# Altium PCB METR4810_PCB_b_Layout.PcbDoc
Units mil, origin at the board's own origin, x right, y up, seen from the top; angles counter-clockwise.
Board outline 2400 x 2615 mil, 2 copper layers (Top Layer, Bottom Layer); 35 components, 39 nets, 163 pads, 21 vias.
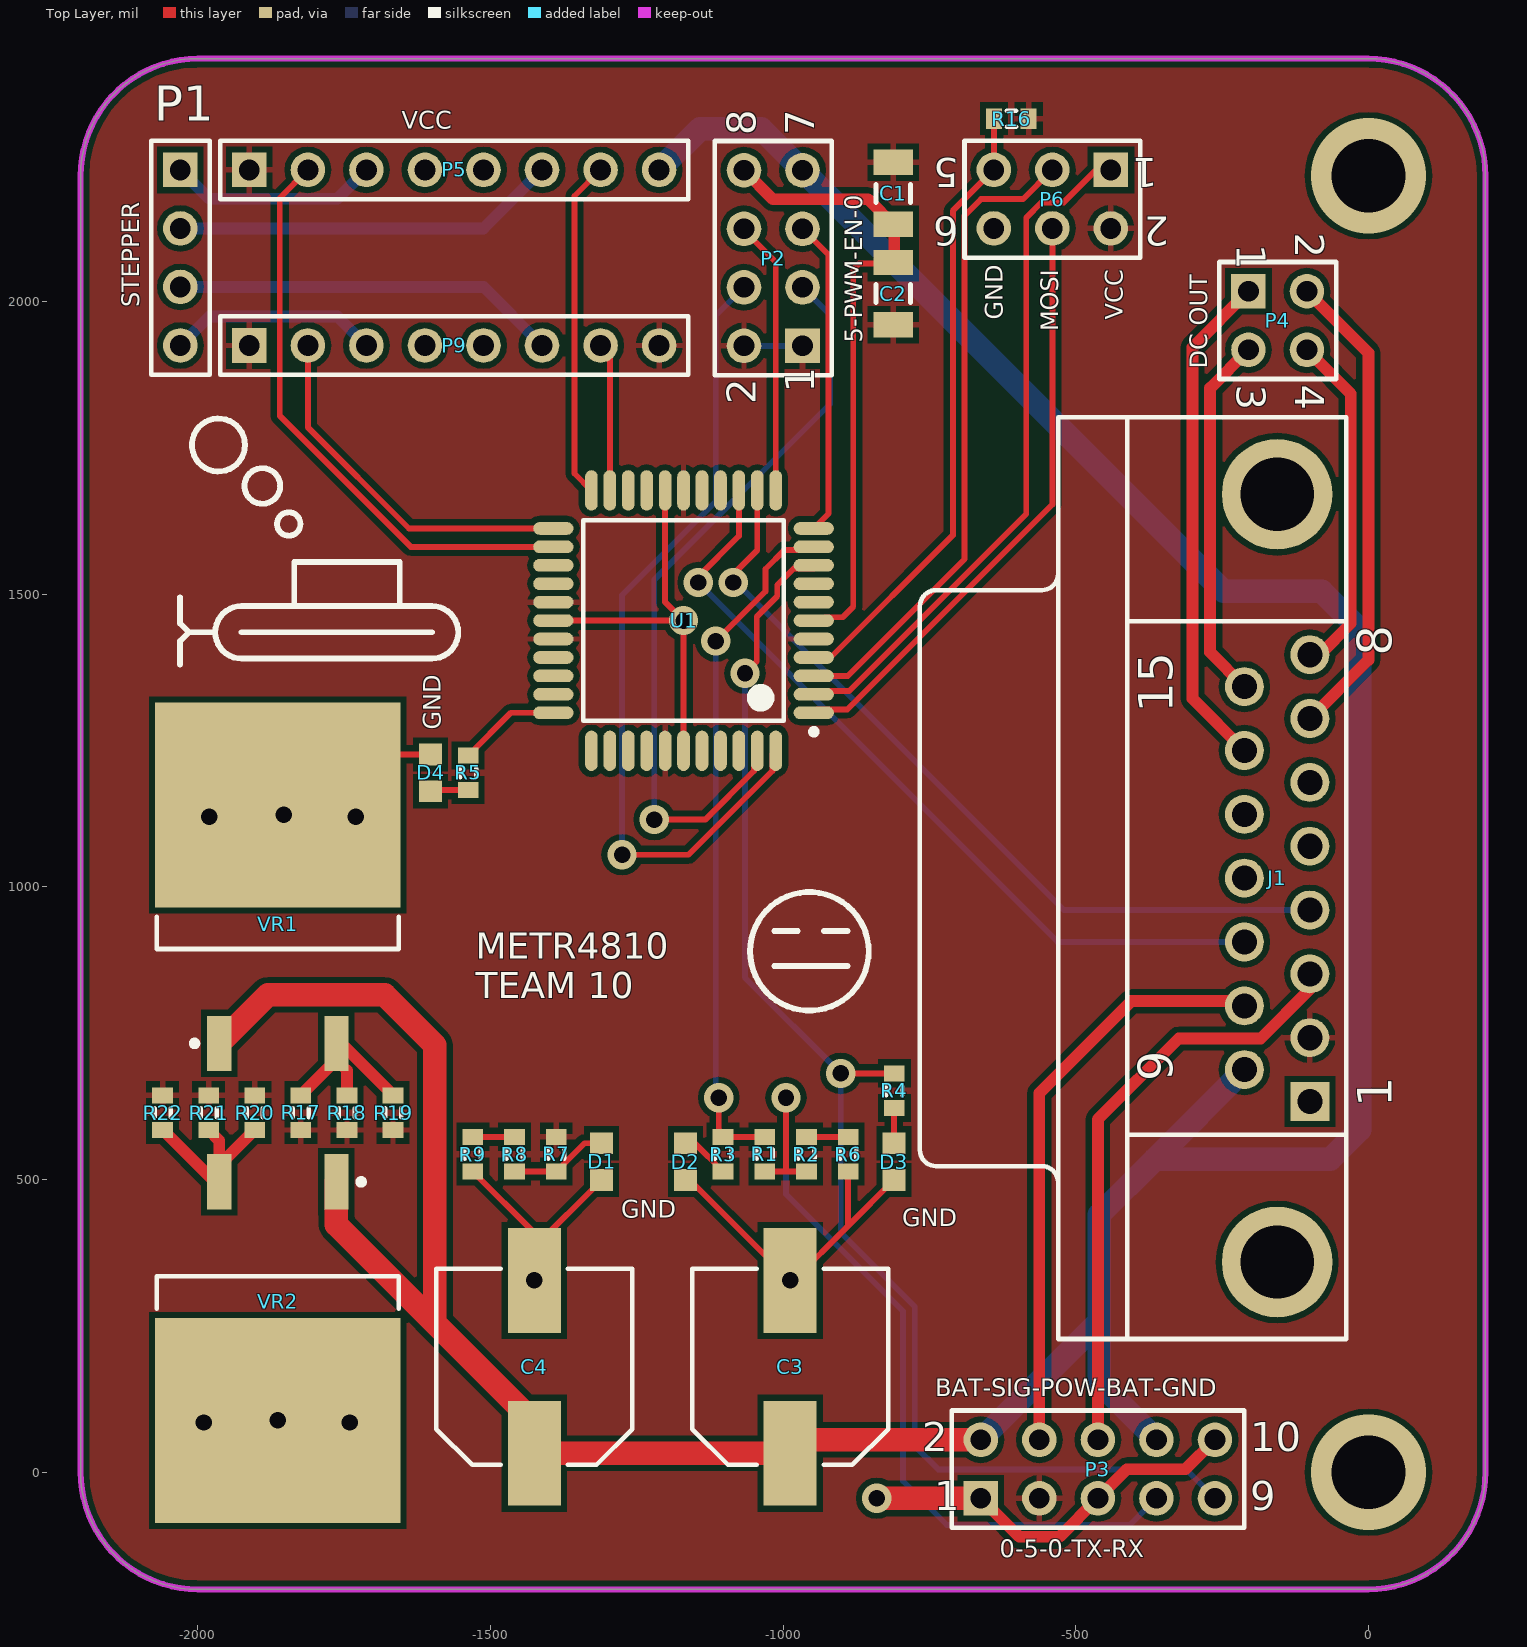
[diagram p0: Top Layer view]
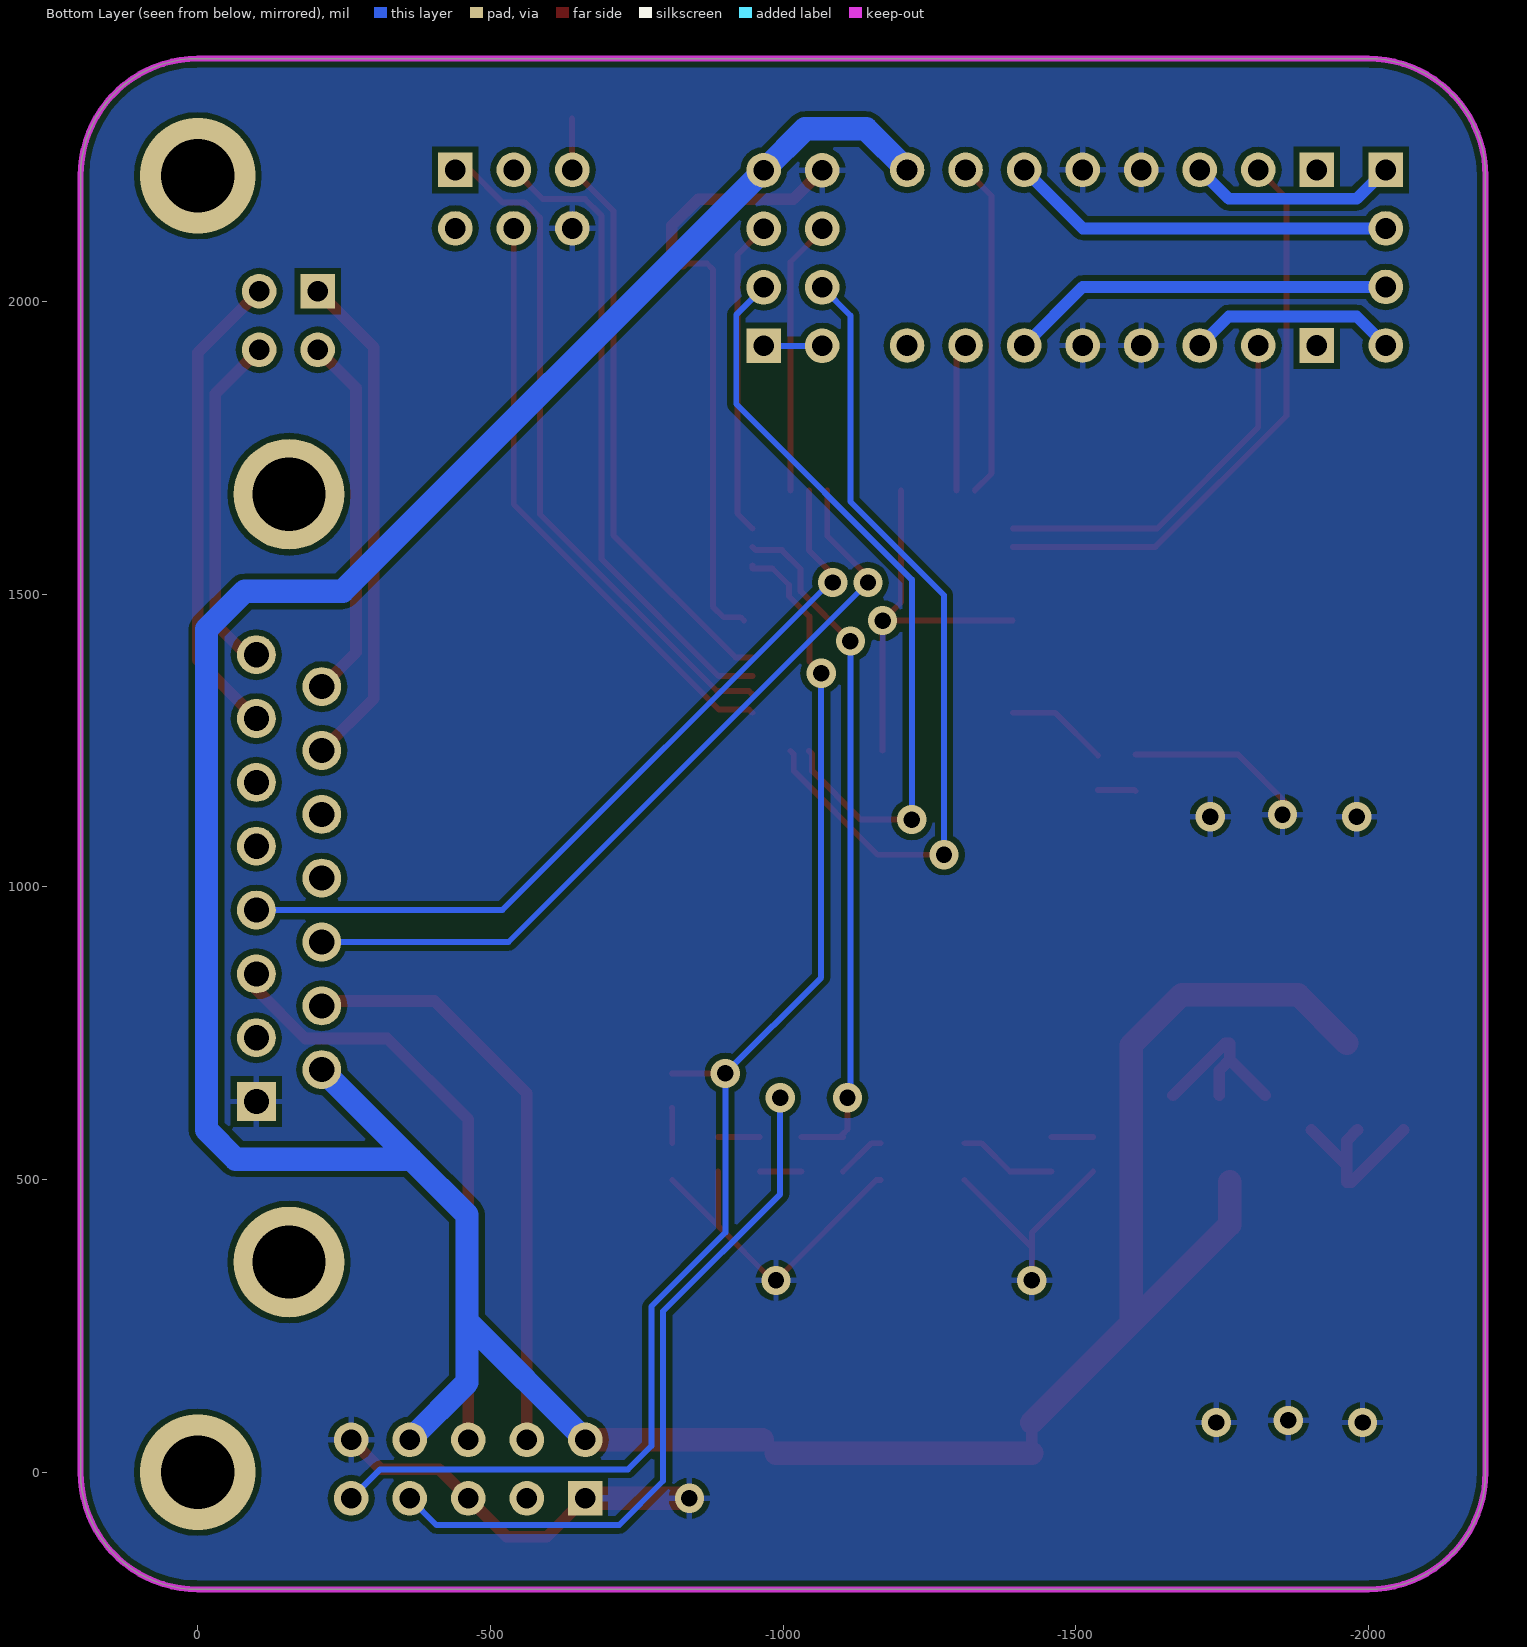
[diagram p1: Bottom Layer view, seen from below]

## Layer stack, top to bottom
Top Solder: solder mask 0.4, Solder Resist, Dk 3.5
Top Layer: signal copper 1.4
Dielectric 1: dielectric 12.6, FR-4, Dk 4.8
Bottom Layer: signal copper 1.4
Bottom Solder: solder mask 0.4, Solder Resist, Dk 3.5

## Board outline
-2200,0 -2200,2215 cw(c-2000,2215) -2000,2415 0,2415 cw(c0,2215) 200,2215 200,0 cw(c0,0) 0,-200 -2000,-200 cw(c-2000,0)

## Design rules (kind name [scope] priority, off if disabled: settings)
Clearance [All] p1: gap=10
PolygonConnect [All] p1: connectstyle=Relief reliefconductorwidth=10 reliefentries=4 polygonreliefangle="90 Angle" airgapwidth=10
RoomDefinition METR4810_Schematic [InComponentClass('METR4810_Schematic')] p1: confinementstyle=ConfineIn formatcopy=TRUE lockcomponents=FALSE outline -2200,2415 200,2415 200,-200 -2200,-200
RoutingVias [All] p1: holewidth=28 width=50 viastyle="Through Hole" minholewidth=28 minwidth=50 maxholewidth=28 maxwidth=50
SolderMaskExpansion [All] p1: expansion=4
Width [All] p1: maxlimit=40 minlimit=10 preferedwidth=10
30 further rules are at their usual default settings.

## Components (designator, comment, footprint, x,y, rotation, side; value= is the part's Value field where it differs from the comment)
C1 "Cap Semi" C1206 -811.81,2185 r90 top
C2 "Cap Semi" C1206 -811.81,2013.57 r270 top
C3 "Cap Pol2" CAPAE9983X105M -987.84,180.12 r90 top
C4 "Cap Pol2" CAPAE9983X105M -1425,180.12 r90 top
D1 "LED1" L0603 -1310,530.68 r270 top
D2 "LED1" L0603 -1166.9,530.68 r270 top
D3 "LED1" L0603 -810.68,530.68 r270 top
D4 "LED1" L0603 -1602.17,1195 r90 top
J1 "D Connector 15" DSUB1.385-2H15 -530,1015 r90 top
P1 "Header 4" HDR1X4 -2029.69,2225 r270 top
P2 "Header 4X2" HDR2X4 -966.81,1924.35 r90 top
P3 "Header 5X2" HDR2X5 -662.16,-44.49 r0 top
P4 "Header 2X2" HDR2X2 -205,2017.67 r270 top
P5 "Header 8" HDR1X8 -1911.81,2225 r0 top
P6 "Header 3X2" HDR2X3 -440,2225 r180 top
P9 "Header 8" HDR1X8 -1911.81,1925 r0 top
R1 "Res3" J1-0603 -1031.3,543.47 r270 top
R2 "Res3" J1-0603 -960.06,543.47 r90 top
R3 "Res3" J1-0603 -1102.54,543.47 r90 top
R4 "Res3" J1-0603 -810,651.91 r90 top
R5 "Res3" J1-0603 -1538.02,1195 r90 top
R6 "Res3" J1-0603 -888.81,543.47 r270 top
R7 "Res3" J1-0603 -1387.51,543.47 r270 top
R8 "Res3" J1-0603 -1458.76,543.47 r90 top
R9 "Res3" J1-0603 -1530,543.47 r270 top
R16 "Res3" J1-0603 -610,2312.57 r0 top
R17 "Res3" J1-0603 -1823.79,614.34 r270 top
R18 "Res3" J1-0603 -1745.05,614.34 r270 top
R19 "Res3" J1-0603 -1666.31,614.34 r270 top
R20 "Res3" J1-0603 -1902.53,614.34 r90 top
R21 "Res3" J1-0603 -1981.27,614.34 r90 top
R22 "Res3" J1-0603 -2060.01,614.34 r90 top
U1 "ATmega324PA-AU" 44A_N -1170,1455 r180 top
VR1 "Volt Reg" D2PAK_N -1863.16,1000.33 r90 top
VR2 "Volt Reg" D2PAK_N -1863.16,228.35 r270 top

## Footprints (in the part's own frame and the unit in brackets; to place one, negate y for a bottom-side part, rotate by r counter-clockwise, add the part's x,y. Pads: shape width x height; smd on the part's side, far side on the other; paste and mask are expansions set on the pad)
44A_N [mm] "Thin QFP, 44-Leads, Body 10x10mm, Pitch 0.8mm, IPC Medium Density"
  oval 1.75x0.55 smd: 1(-5.65,4) 2(-5.65,3.2) 3(-5.65,2.4) 4(-5.65,1.6) 5(-5.65,0.8) 6(-5.65,0) 7(-5.65,-0.8) 8(-5.65,-1.6) 9(-5.65,-2.4) 10(-5.65,-3.2) 11(-5.65,-4) 23(5.65,-4) 24(5.65,-3.2) 25(5.65,-2.4) 26(5.65,-1.6) 27(5.65,-0.8) 28(5.65,0) 29(5.65,0.8) 30(5.65,1.6) 31(5.65,2.4) 32(5.65,3.2) 33(5.65,4)
  oval 0.55x1.75 smd: 12(-4,-5.65) 13(-3.2,-5.65) 14(-2.4,-5.65) 15(-1.6,-5.65) 16(-0.8,-5.65) 17(0,-5.65) 18(0.8,-5.65) 19(1.6,-5.65) 20(2.4,-5.65) 21(3.2,-5.65) 22(4,-5.65) 34(4,5.65) 35(3.2,5.65) 36(2.4,5.65) 37(1.6,5.65) 38(0.8,5.65) 39(0,5.65) 40(-0.8,5.65) 41(-1.6,5.65) 42(-2.4,5.65) 43(-3.2,5.65) 44(-4,5.65)
  silkscreen extent -5.77,-4.35 4.35,4.95, body extent -5,-5 5,5, height 1.2
C1206 [mm] "Chip Capacitor, Body 3.2x1.6mm, IPC High Density"
  rect 1.1x1.7 smd: 1(-1.35,0) 2(1.35,0)
  silkscreen extent -0.4,-0.75 0.4,0.75, body extent -1.7,-0.9 1.7,0.9, height 1.3
CAPAE9983X105M [mm] "Aluminum Electrolytic Capacitor, Body 8.30x8.30x10.50mm, IPC Low Density"
  rect 4.55x2.3 smd: 1(-3.75,0) 2(3.75,0)
  silkscreen extent -4.25,-4.25 4.25,4.25, body extent -4.25,-4.25 4.25,4.25, height 10.5
D2PAK_N [mm] "D2-PAK, 4-Leads, Body 8.8x10.4mm, Pitch 2.54mm, Lead Span 15.1mm, IPC Medium Density"
  rect 2.4x1.05 smd: 1(-6.8,2.54) 3(-6.8,-2.54)
  rect 8.9x10.65 smd: 2(3.55,0)
  silkscreen extent -6.92,-5.25 -1.3,5.25, body extent -2.7,-5.28 6.3,5.28, height 4.69
DSUB1.385-2H15 [mm] "Connector; D Subminiature; 15 Position; Right Angle; Pitch 1.385 mm"
  rect 1.69x1.69 hole 1.09: 1(-9.695,-10.92)
  round 1.69 hole 1.09: 2(-6.925,-10.92) 3(-4.155,-10.92) 4(-1.385,-10.92) 5(1.385,-10.92) 6(4.155,-10.92) 7(6.925,-10.92) 8(9.695,-10.92) 9(-8.31,-8.08) 10(-5.54,-8.08) 11(-2.77,-8.08) 12(0,-8.08) 13(2.77,-8.08) 14(5.54,-8.08) 15(8.31,-8.08)
  round 4.8 hole 3.18: 16(-16.66,-9.5) 17(16.66,-9.5)
  silkscreen extent -20,-12.5 20,6
HDR1X4 [mm] "Connector; Header; 4 Position"
  rect 1.5x1.5 hole 0.9: 1(0,0)
  round 1.5 hole 0.9: 2(2.54,0) 3(5.08,0) 4(7.62,0)
  silkscreen extent -1.27,-1.27 8.89,1.27
HDR1X8 [mm] "Connector; Header; 8 Position"
  rect 1.5x1.5 hole 0.9: 1(0,0)
  round 1.5 hole 0.9: 2(2.54,0) 3(5.08,0) 4(7.62,0) 5(10.16,0) 6(12.7,0) 7(15.24,0) 8(17.78,0)
  silkscreen extent -1.27,-1.27 19.05,1.27
HDR2X2 [mm] "Connector; Header; 2x2 Position"
  rect 1.5x1.5 hole 0.9: 1(0,0)
  round 1.5 hole 0.9: 2(0,2.54) 3(2.54,0) 4(2.54,2.54)
  silkscreen extent -1.27,-1.27 3.81,3.81
HDR2X3 [mm] "Connector; Header; 3x2 Position"
  rect 1.5x1.5 hole 0.9: 1(0,0)
  round 1.5 hole 0.9: 2(0,2.54) 3(2.54,0) 4(2.54,2.54) 5(5.08,0) 6(5.08,2.54)
  silkscreen extent -1.27,-1.27 6.35,3.81
HDR2X4 [mm] "Connector; Header; 4x2 Position"
  rect 1.5x1.5 hole 0.9: 1(0,0)
  round 1.5 hole 0.9: 2(0,2.54) 3(2.54,0) 4(2.54,2.54) 5(5.08,0) 6(5.08,2.54) 7(7.62,0) 8(7.62,2.54)
  silkscreen extent -1.27,-1.27 8.89,3.81
HDR2X5 [mm] "Connector; Header; 5x2 Position"
  rect 1.5x1.5 hole 0.9: 1(0,0)
  round 1.5 hole 0.9: 2(0,2.54) 3(2.54,0) 4(2.54,2.54) 5(5.08,0) 6(5.08,2.54) 7(7.62,0) 8(7.62,2.54) 9(10.16,0) 10(10.16,2.54)
  silkscreen extent -1.27,-1.27 11.43,3.81
J1-0603 [mm] "Chip Resistor, Body 1.6x0.8mm, IPC High Density"
  rect 0.7x0.9 smd: 1(-0.75,0) 2(0.75,0)
  silkscreen extent -0.2,-0.35 0.2,0.35, body extent -0.85,-0.48 0.85,0.48, height 0.9
L0603 [mm]
  rect 0.95x1 smd: 1(-0.8,0) 2(0.8,0)

## Part data
C1 C2: "Capacitor (Semiconductor SIM Model)"
C3 C4: "Polarized Capacitor (Axial)"
D1 D2 D3 D4: "Typical RED GaAs LED"
J1: "Receptacle Assembly, 15 Position, Right Angle"
P1: "Header, 4-Pin"
P2: "Header, 4-Pin, Dual row"
P3: "Header, 5-Pin, Dual row"
P4: "Header, 2-Pin, Dual row"
P5 P9: "Header, 8-Pin"
P6: "Header, 3-Pin, Dual row"
R1 R2 R3 R4 R5 R6 R7 R8 R9 R16 R17 R18 R19 R20 R21 R22: "Resistor"
U1: "8-bit AVR Microcontroller, 32KB Flash, 1KB EEPROM, 2KB SRAM, 44-pin TQFP, Industrial Grade (-40°C to 85°C)"
VR1 VR2: "Voltage Regulator"

## Via types
v1: diameter 50, hole 28, Top Layer to Bottom Layer, 19 vias
v2: diameter 196.85, hole 125.98, Top Layer to Bottom Layer, 2 vias

## Nets (pads, with @x,y where several pads share a name; then routed paths per layer and width w, separated by ;. In a path a pad name is that pad's centre, name@x,y a point inside that pad or via, vN(x,y) a via of type N, cw(c..) or ccw(c..) an arc to the next point about the centre after c; other vN are vias at no path point)
BAT: C3.1 C4.1 J1.9 P2.7 P3.2 P3.8 P5.8 VR1.1 VR2.1 | length 6156.1
  Top Layer w20: C4.1 C4.1@-1425,85 ; C3.1 C3.1@-964.81,55.51
  Top Layer w40: VR1.1 -1880,815.78 -1680.78,815.78 -1595,730 -1595,255 ; VR2.1 -1763.16,423.16 -1595,255 ; C4.1 C3.1 ; C4.1@-1425,85 -1595,255 ; C3.1@-964.81,55.51 P3.2
  Bottom Layer w40: P5.8 -1141.81,2295 -1037.46,2295 P2.7 -247.46,1505 -80,1505 -15,1440 -15,585 -65,535 -364.72,535 ; P3.2 -460,257.67 ; P3.8 -460,153.35 -460,257.67 ; J1.9 -364.72,535 ; -460,257.67 -460,439.72 -364.72,535
CAM_POW: J1.3 P3.6 | length 1027.9
  Top Layer w10: J1.3@-100.08,824.92 J1.3
  Top Layer w20: P3.6 -462.16,602.84 -323.9,741.1 -183.9,741.1 J1.3@-100.08,824.92
CAM_SIG: J1.10 P3.4 | length 1011.1
  Top Layer w10: J1.10@-221.39,796.89 J1.10
  Top Layer w20: P3.4 -562.16,647.84 -405,805 -229.5,805 J1.10@-221.39,796.89
"DC 1 ENABLE": P2.6 U1.12 | length 469.4
  Top Layer w10: P2.6 -1066.81,2121.81 -1012.52,2067.52 U1.12
"DC 2 ENABLE": P2.5 U1.11 | length 540.8
  Top Layer w10: P2.5 -922.28,2079.82 -922.28,1637.76 U1.11
GND: C1.1 C2.1 C3.2 C4.2 D1.2 D2.2 D3.2 D4.2 J1.1 P2.8 P3.1 P3.5 P3.10 P5.4 P5.5 P6.6 P9.4 P9.5 R6.2 R9.2 U1.6 U1.18 U1.28 U1.39 VR1.2 VR2.2 | length 3699.5
  Top Layer w10: VR1.2 -1776.76,1226.5 D4.2 ; R9.2 -1425,408.95 C4.2@-1425,384.18 ; v1(-1425,327.76) C4.2@-1425,384.18 ; U1.28 v1(-1170,1455) ; D1.2 C4.2@-1425,384.18 ; U1.18 -1201.5,1486.5 v1(-1170,1455) ; U1.39 v1(-1170,1455) ; D2.2 -1159.27,499.18 v1(-987.84,327.76) -982.11,327.76 -888.81,421.05 ; U1.6@-933.23,1455 -927.56,1460.67 -898.11,1460.67 -880,1478.78 -880,2055 -870,2065 C2.1@-828.53,2065 ; R6.2 -888.81,421.05 ; D3.2 -888.81,421.05
  Top Layer w20: P2.8 -1017.28,2174.82 -854.82,2174.82 -810,2130 -810,2083.53 C2.1@-828.53,2065 ; P3.1 -596.65,-110 -527.67,-110 P3.5 -412.63,5.04 -312.63,5.04 P3.10
  Top Layer w40: v1@-840,-40 -835.51,-44.49 P3.1
  other v1: -840,-44.49 -1990,85 -1740,85 -1863.16,88.58 -1980,1120 -1730,1120 -1853.16,1123.58
MISO: P6.1 U1.2 | length 1175.2
  Top Layer w10: U1.2 -941.89,1334.69 -887.03,1334.69 -584.53,1637.19 -584.53,2143.44 -558.44,2169.53 -520.47,2169.53 -465,2225 P6.1
MOSI: P6.4 U1.1 | length 1026.6
  Top Layer w10: U1.1 -941.89,1303.19 -890.24,1303.19 -540,1653.43 P6.4
MOTOR_1A: J1.8 P4.4 | length 590.9
  Top Layer w20: P4.4 -30,1842.67 -30,1450 -83.31,1396.69 J1.8
MOTOR_1B: J1.15 P4.3 | length 626.9
  Top Layer w20: J1.15 -270.47,1400.75 -270.47,1852.2 P4.3
MOTOR_2A: J1.7 P4.2 | length 815
  Top Layer w20: P4.2 0,1912.67 0,1387.72 J1.7
MOTOR_2B: J1.14 P4.1 | length 860.8
  Top Layer w20: J1.14 -300.47,1321.69 -300.47,1922.2 P4.1
NetD2_1: D2.1 R3.1 | length 84.3
  Top Layer w10: D2.1 -1150.77,562.18 R3.1
NetD3_1: D3.1 R4.1 | length 60.5
  Top Layer w10: D3.1 -810.68,621.7 R4.1
NetD4_1: D4.1 R5.1 | length 65
  Top Layer w10: D4.1 -1600.2,1165.47 R5.1
NetR2_2: R2.2 R6.1 | length 71.2
  Top Layer w10: R2.2 R6.1
NetR8_2: R8.2 R9.1 | length 71.2
  Top Layer w10: R9.1 R8.2
NetR17_1: R17.1 R18.1 R19.1 VR1.3 | length 315.6
  Top Layer w20: R17.1 VR1.3@-1763.16,704.5 ; R18.1 -1745.05,686.39 VR1.3@-1763.16,704.5 ; R19.1 -1755.06,732.62 VR1.3 VR1.3@-1763.16,704.5
NetR20_1: R20.1 R21.1 R22.1 VR2.3 | length 315.6
  Top Layer w20: R22.1 -1971.26,496.06 VR2.3 VR2.3@-1963.16,524.18 ; R21.1 -1963.16,566.7 VR2.3@-1963.16,524.18 ; R20.1 VR2.3@-1963.16,524.18
POWER: D1.1 R7.2 R8.1 | length 168.7
  Top Layer w10: R8.1 R7.2 -1339.29,562.18 D1.1
"PWM DC 1": P2.4 U1.44 | length 1408.4
  Top Layer w10: v1(-1275,1055) -1161.43,1055 -1018.19,1198.24 -1018.19,1226.89 U1.44
  Bottom Layer w10: v1(-1275,1055) -1275,1498.28 -1115,1658.28 -1115,1976.16 P2.4
"PWM DC 2": P2.3 U1.43 | length 1294.5
  Top Layer w10: v1(-1220,1115) -1132.92,1115 -1049.69,1198.24 -1049.69,1226.89 U1.43
  Bottom Layer w10: v1(-1220,1115) -1220,1525 -920,1825 -920,1977.54 P2.3
"PWM SV 1": J1.4 U1.13 | length 1391.1
  Top Layer w10: v1(-1085,1520) -1085,1534.02 -1044.02,1575 U1.13
  Bottom Layer w10: v1(-1085,1520) -1080,1520 -520.47,960.47 J1.4
"PWM SV 2": J1.11 U1.14 | length 1373.7
  Top Layer w10: v1(-1145,1520) -1145,1530 -1075.51,1599.49 U1.14
  Bottom Layer w10: v1(-1145,1520) -530.94,905.95 J1.11
RESET: P6.5 R16.1 U1.4 | length 1064.9
  Top Layer w10: U1.4 -918.91,1392.01 -710,1600.92 -710,2155 P6.5 -639.53,2225.47 R16.1
RXD: P3.9 R4.2 U1.9 | length 2334.7
  Top Layer w10: v1(-1065,1365) -1045,1385 -1045,1461.72 -1010,1496.72 -1010,1515.7 -981.88,1543.82 -947.56,1543.82 U1.9 ; v1(-901.44,681.44) R4.2
  Bottom Layer w10: v1(-1065,1365) -1065,845 v1(-901.44,681.44) -901.44,409.72 -775,283.28 -775,45 -735,5 -311.65,5 P3.9
S-IN1: P5.2 U1.24 | length 1000.3
  Top Layer w10: P5.2 -1860,2176.81 -1860,1805 -1635.98,1580.98 U1.24
S-IN2: P5.7 U1.22 | length 578
  Top Layer w10: U1.22 -1356.34,1706.3 -1356.34,2180.47 P5.7
S-IN3: P9.2 U1.23 | length 630.8
  Top Layer w10: P9.2 -1811.81,1785.1 -1639.2,1612.48 U1.23
S-IN4: P9.7 U1.21 | length 263.4
  Top Layer w10: P9.7 -1295.98,1925 U1.21
S-OUT1: P1.1 P5.3 | length 358.9
  Bottom Layer w20: P1.1 -1980.17,2175.47 -1761.34,2175.47 P5.3
S-OUT2: P1.2 P5.6 | length 659.3
  Bottom Layer w20: P1.2 -1511.81,2125 P5.6
S-OUT3: P1.4 P9.3 | length 358.9
  Bottom Layer w20: P1.4 -1980.17,1974.53 -1761.34,1974.53 P9.3
S-OUT4: P1.3 P9.6 | length 659.3
  Bottom Layer w20: P1.3 -1511.81,2025 P9.6
SCK: P6.3 U1.3 | length 1109.3
  Top Layer w10: U1.3 -889.49,1360.51 -690,1560 -690,2146.72 -661.72,2175 -590,2175 P6.3
STATUS: R5.2 U1.33 | length 175.8
  Top Layer w10: R5.2 -1465.03,1297.52 U1.33
TXD: R1.1 R3.2 U1.10 | length 1181.2
  Top Layer w10: v1(-1115,1420) -1030,1505 -1030,1543.28 -997.97,1575.31 -953.23,1575.31 U1.10 ; v1(-1110,640) -1110,585.54 -1100,575.54 R3.2 R1.1
  Bottom Layer w10: v1(-1115,1420) -1115,660 v1@-1100,645
TXD_3.3V: P3.7 R1.2 R2.1 | length 1418.2
  Top Layer w10: R1.2 -995.68,513.95 ; v1(-995,640) -995,514.62 -995.68,513.95 ; R2.1 -995.68,513.95
  Bottom Layer w10: v1(-995,640) -995,475 -795,275 -795,-15 -720,-90 -407.67,-90 P3.7
VCC: C1.2 C2.2 J1.2 P2.1 P2.2 P3.3 P5.1 P6.2 P9.1 P9.8 R7.1 R16.2 R17.2 R18.2 R19.2 R20.2 R21.2 R22.2 U1.5 U1.17 U1.27 U1.29 U1.38 | length 100
  Bottom Layer w10: P2.2 P2.1
pads on no net: J1.5 J1.6 J1.12 J1.13 J1.16 J1.17 U1.7 U1.8 U1.15 U1.16 U1.19 U1.20 U1.25 U1.26 U1.30 U1.31 U1.32 U1.34 U1.35 U1.36 U1.37 U1.40 U1.41 U1.42
copper on no net:
  other v2: 0,0 0,2215

## Polygon pours and split planes (outlines as drawn)
VCC on Top Layer "VCC_L01_P003" (solid, remove dead copper, pour order 3): -2200,0 -2200,2215 cw(c-2000,2215) -2000,2415 0,2415 cw(c0,2215) 200,2215 200,0 cw(c0,0) 0,-200 -2000,-200 cw(c-2000,0)
GND on Bottom Layer "GND_L02_P004" (solid, remove dead copper, pour order 4): -2200,0 -2200,2215 cw(c-2000,2215) -2000,2415 0,2415 cw(c0,2215) 200,2215 200,0 cw(c0,0) 0,-200 -2000,-200 cw(c-2000,0)

## Keep-outs
Keep-Out Layer:
  the board outline again, w10

## Silkscreen, mask and mechanical layers (free items; w line width, h text height)
Top Overlay:
  circle w10: c-955,890 r101.24
  circle w10: c-1844.59,1620 r20
  circle w10: c-1889.59,1685 r30.41
  circle w10: c-1964.59,1755 r45.28
  lines w10: -2030,1380 -2030,1420 -2015,1435 ; -2030,1495 -2030,1450 -2015,1435 ; -1970,1435 -2015,1435 ; -1925,1435 -1600,1435 ; -1835,1480 -1835,1555 -1655,1555 -1655,1480 ; -1015,865 -890,865 ; -1015,925 -975,925 ; -930,925 -890,925 ; -1925,1390 cw(c-1925,1435) -1925,1480 -1600,1480 cw(c-1600,1435) -1600,1390 -1925,1390
  text "VCC" at -1651.1,2295 h30
  text "STEPPER" at -2100,1990 h30 r90
  text "GND" at -625,1968.89 h30 r90
  text "VCC" at -420,1968.89 h30 r90
  text "MOSI" at -530,1948.9 h30 r90
  text "5-PWM-EN-0" at -865,1930 h30 r90
  text "DC OUT" at -275,1885 h30 r90
  text "GND" at -1585,1268.9 h30 r90
  text "METR4810 / TEAM 10" at -1525,810 h45
  text "GND" at -1276.1,435 h30
  text "GND" at -796.1,420 h30
  text "BAT-SIG-POW-BAT-GND" at -740,130 h30
  text "0-5-0-TX-RX" at -630,-145 h30

## Text inside footprints (layer, text, board x,y; h text height)
J1: Top Overlay "9" at -334.13,668.15 h59.06 r90; Top Overlay "15" at -334.13,1297.87 h59.06 r90; Top Overlay "8" at 39.88,1395 h59.06 r90; Top Overlay "1" at 39.88,623.46 h59.06 r90
P2: Top Overlay "2" at -1046.81,1824.35 h50 r90; Top Overlay "1" at -946.81,1844.35 h50 r90; Top Overlay "7" at -946.81,2284.35 h50 r90; Top Overlay "8" at -1046.81,2284.35 h50 r90
P3: Top Overlay "2" at -762.16,35.51 h50; Top Overlay "1" at -742.16,-64.49 h50; Top Overlay "9" at -202.16,-64.49 h50; Top Overlay "10" at -202.16,35.51 h50
P4: Top Overlay "3" at -225,1857.67 h50 r270; Top Overlay "4" at -125,1857.67 h50 r270; Top Overlay "2" at -125,2117.67 h50 r270; Top Overlay "1" at -225,2097.67 h50 r270
P6: Top Overlay "6" at -700,2145 h50 r180; Top Overlay "5" at -700,2245 h50 r180; Top Overlay "2" at -340,2145 h50 r180; Top Overlay "1" at -360,2245 h50 r180